# Altium PCB PCB.PcbDoc
Units mm, origin at the board's own origin, x right, y up, seen from the top; angles counter-clockwise.
Board outline 152.4 x 101.6 mm, 2 copper layers (Top Layer, Bottom Layer); 4 components, 40 nets, 73 pads, 0 vias.
Unrouted connection lines stored in the file: 24.
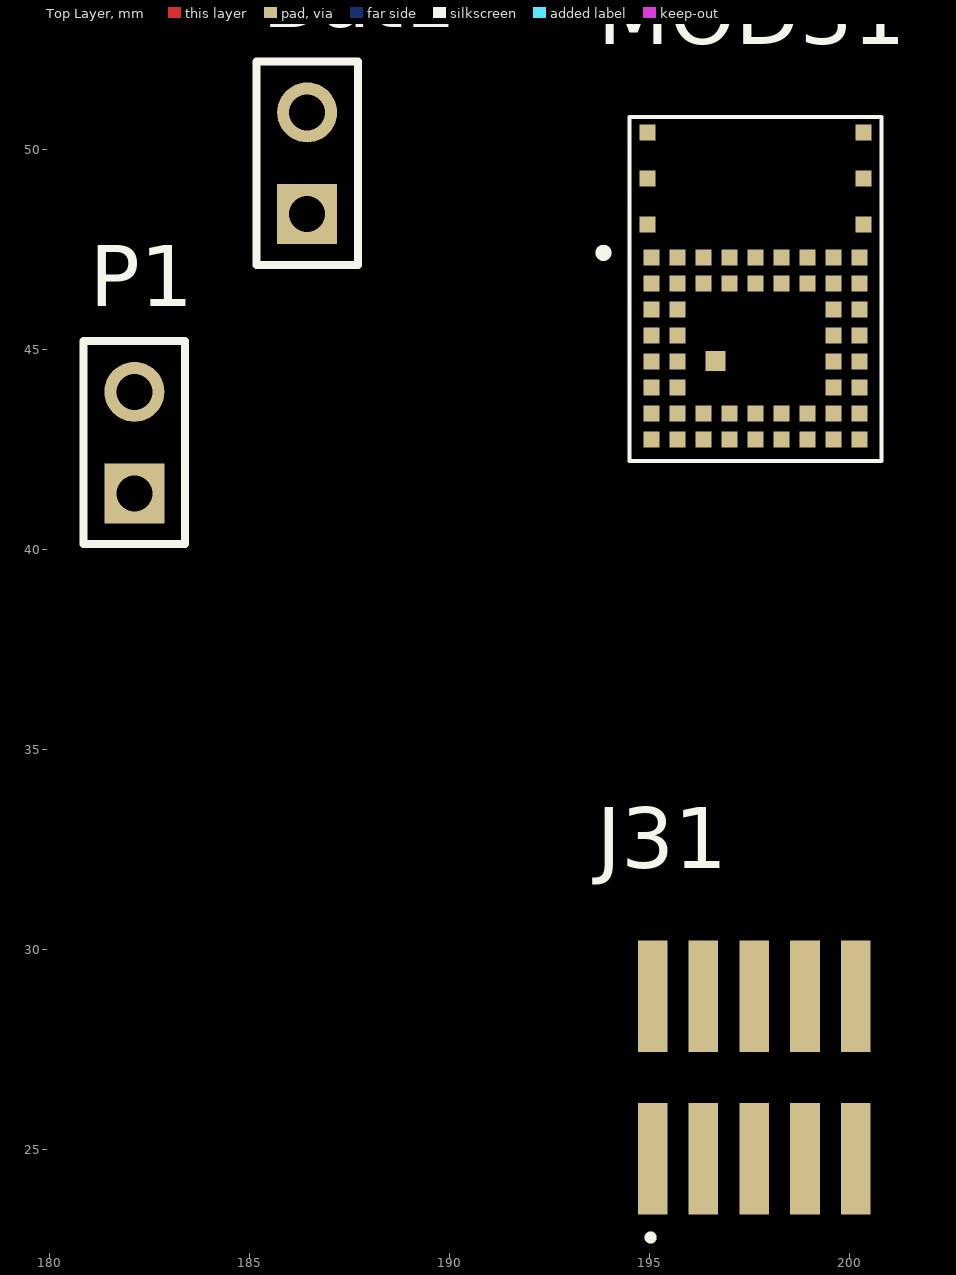
[diagram p0: Top Layer view]
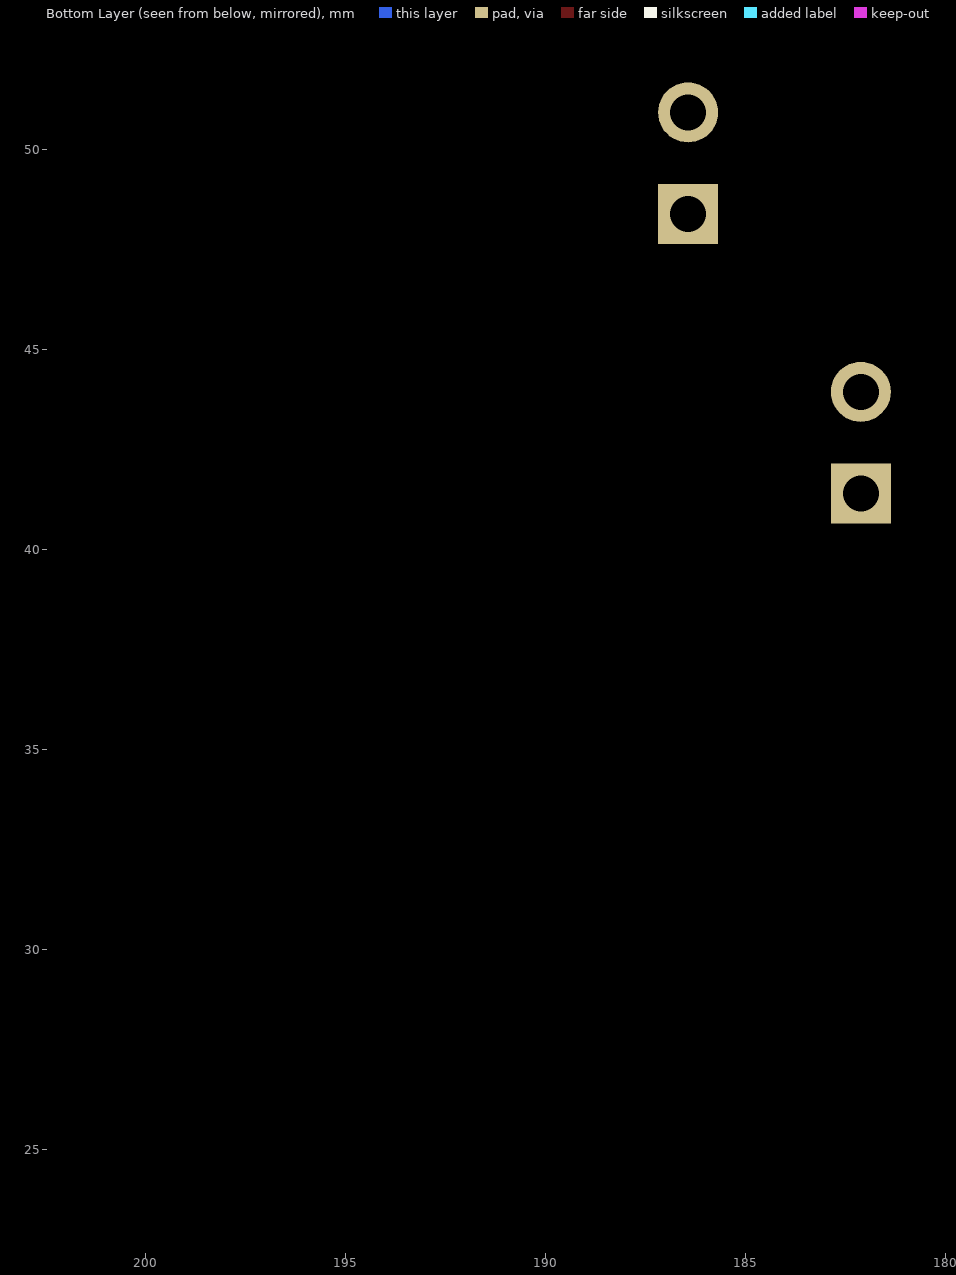
[diagram p1: Bottom Layer view, seen from below]

## Layer stack, top to bottom
Top Solder: solder mask 0.0102, Solder Resist, Dk 3.5
Top Layer: signal copper 0.0356
Dielectric 1: dielectric 0.32, FR-4, Dk 4.8
Bottom Layer: signal copper 0.0356
Bottom Solder: solder mask 0.0102, Solder Resist, Dk 3.5

## Board outline
25.4,25.4 177.8,25.4 177.8,127 25.4,127

## Design rules (kind name [scope] priority, off if disabled: settings)
Clearance [All] p1: gap=0.15 ignorepadtopadclearanceinfootprint=FALSE
DiffPairsRouting [All] p1: maxlimit=0.254 minlimit=0.15 mostfreqgap=0.254 toplayer_minwidth=0.1 toplayer_maxwidth=0.381 toplayer_prefwidth=0.381 bottomlayer_minwidth=0.1 bottomlayer_maxwidth=0.381 bottomlayer_prefwidth=0.381 maxuncoupledlength=12.7
HoleSize [All] p1: absolutevalues=TRUE maxlimit=2.54 minlimit=0.2 maxpercent=80.000 minpercent=20.000
PolygonConnect [All] p1: connectstyle=Relief reliefconductorwidth=0.254 reliefentries=4 polygonreliefangle="90 Angle" airgapwidth=0.254
RoutingVias [All] p1: holewidth=0.711 width=1.27 viastyle="Through Hole" minholewidth=0.1 minwidth=0.2 maxholewidth=0.711 maxwidth=1.27
SolderMaskExpansion [All] p1: expansion=0.102 istentingtop=FALSE
UnRoutedNet [All] p1: checkbadconnections=TRUE
Width [All] p1: maxlimit=2 minlimit=0.1 preferedwidth=0.254
27 further rules are at their usual default settings.

## Components (designator, comment, footprint, x,y, rotation, side; value= is the part's Value field where it differs from the comment)
Bat1 "Header 2" HDR1X2 186.436,48.387 r90 top
J31 "FTSH-105-01-L-DV-K-TR" FTSH10501LDVKTR 197.612,26.8 r0 top
MOD31 "Laird, BL653u" 45300059C 197.645,46.516 r0 top
P1 "Tensometr" HDR1X2 182.118,41.402 r90 top

## Footprints (in the part's own frame and the unit in brackets; to place one, negate y for a bottom-side part, rotate by r counter-clockwise, add the part's x,y. Pads: shape width x height; smd on the part's side, far side on the other; paste and mask are expansions set on the pad)
45300059C [mm]
  rect 0.4x0.4 smd: 1(-2.6,0.78) 2(-1.95,0.78) 3(-1.3,0.78) 4(-0.65,0.78) 5(0,0.78) 6(0.65,0.78) 7(1.3,0.78) 8(1.95,0.78) 9(2.6,0.78) 10(2.6,0.13) 11(2.6,-0.52) 12(2.6,-1.17) 13(2.6,-1.82) 14(2.6,-2.47) 15(2.6,-3.12) 16(2.6,-3.77) 17(1.95,-3.77) 18(1.3,-3.77) 19(0.65,-3.77) 20(0,-3.77) 21(-0.65,-3.77) 22(-1.3,-3.77) 23(-1.95,-3.77) 24(-2.6,-3.77) 25(-2.6,-3.12) 26(-2.6,-2.47) 27(-2.6,-1.82) 28(-2.6,-1.17) 29(-2.6,-0.52) 30(-2.6,0.13) 31(-1.95,0.13) 32(-1.3,0.13) 33(-0.65,0.13) 34(0,0.13) 35(0.65,0.13) 36(1.3,0.13) 37(1.95,0.13) 38(1.95,-0.52) 39(1.95,-1.17) 40(1.95,-1.82) 41(1.95,-2.47) 42(1.95,-3.12) 43(1.3,-3.12) 44(0.65,-3.12) 45(0,-3.12) 46(-0.65,-3.12) 47(-1.3,-3.12) 48(-1.95,-3.12) 49(-1.95,-2.47) 50(-1.95,-1.82) 51(-1.95,-1.17) 52(-1.95,-0.52) G2(2.7,3.91) G3(2.7,2.76) G4(2.7,1.61) G5(-2.7,1.61) G6(-2.7,2.76) G7(-2.7,3.91)
  rect 0.5x0.5 smd: G1(-1,-1.8)
  silkscreen extent -3.9,-4.3 3.15,4.3, body extent -3.15,-4.3 3.15,4.3, height 1.7
FTSH10501LDVKTR [mm]
  rect 0.74x2.79 smd: 1(-2.54,-2.035) 2(-2.54,2.035) 3(-1.27,-2.035) 4(-1.27,2.035) 5(0,-2.035) 6(0,2.035) 7(1.27,-2.035) 8(1.27,2.035) 9(2.54,-2.035) 10(2.54,2.035)
  silkscreen extent -2.64,-4.05 -2.54,-3.95, body extent -3.14,-3.36 3.14,3.36, height 6.15
HDR1X2 [mm] "Connector; Header; 2 Position"
  rect 1.5x1.5 hole 0.9: 1(0,0)
  round 1.5 hole 0.9: 2(2.54,0)
  silkscreen extent -1.27,-1.27 3.81,1.27

## Part data
Bat1: "Header, 2-Pin", LatestRevisionDate=17-Jul-2002, LatestRevisionNote="Re-released for DXP Platform.", Publisher="Altium Limited"
J31: "Conn Unshrouded Header HDR 10 POS 1.27mm Solder ST Top Entry SMD T/R", Manufacturer_Name=SAMTEC, Mouser Part Number=200-FTSH10501LDVKTR, Datasheet Link=https://componentsearchengine.com/Datasheets/2/FTSH-105-01-L-DV-K-TR.pdf, Geometry.Height=6.05mm, Manufacturer_Part_Number=FTSH-105-01-L-DV-K-TR, Mouser Price/Stock=https://www.mouser.co.uk/ProductDetail/Samtec/FTSH-105-01-L-DV-K-TR?qs=fnpEE5GccuNZAxvMlxrNVQ%3D%3D
MOD31: "BL653µ Integrated Antenna module, 453-00059", Manufacturer=Laird, Manufacturer Part Number=453-00059, Operating Temperature=-40C~85C, Datasheet Link=https://connectivity-staging.s3.us-east-2.amazonaws.com/s3fs-public/2018-12/BL654%20Datasheet%20v1_6.pdf, Mounting=SMT, Substitutes Allowed=NO
P1: library part "Header 2", "Header, 2-Pin", LatestRevisionDate=17-Jul-2002, LatestRevisionNote="Re-released for DXP Platform.", Publisher="Altium Limited"

## Nets (pads, with @x,y where several pads share a name; then routed paths per layer and width w, separated by ;. In a path a pad name is that pad's centre, name@x,y a point inside that pad or via, vN(x,y) a via of type N, cw(c..) or ccw(c..) an arc to the next point about the centre after c; other vN are vias at no path point)
AVCC: P1.1
GND: Bat1.1 J31.3 J31.5 J31.9 MOD31.1 MOD31.3 MOD31.5 MOD31.7 MOD31.9 MOD31.11 MOD31.16 MOD31.18 MOD31.20 MOD31.24 MOD31.48 MOD31.G1 MOD31.G2 MOD31.G3 MOD31.G4 MOD31.G5 MOD31.G6 MOD31.G7
NetBat1_2: Bat1.2
NetC010_1: 
NetC20_2: 
NetC23_1: 
NetIC11_4: 
NetIC12_1: P1.2
NetIC12_3: 
NetIC12_4: 
NetJ01_2: 
NetJ01_4: 
NetJ01_5: 
NetJ01_7: 
NetJ01_10: 
NetJ31_2: J31.2
NetJ31_4: J31.4
NetJ31_6: J31.6
NetJ31_10: J31.10
NetMCU1_8: 
NetMCU1_9: 
NetMCU1_14: 
NetMCU1_18: 
NetMCU1_19: MOD31.14
NetMCU1_20: MOD31.42
NetMCU1_21: MOD31.15
NetMCU1_22: MOD31.44
NetMCU1_27: MOD31.6
NetMCU1_28: MOD31.8
NetMOD31_31: MOD31.31
NetMOD31_34: MOD31.34
NetMOD31_51: MOD31.51
NetMOD31_52: MOD31.52
SPI1_MISO: 
SPI1_MOSI: 
SPI1_NSS_1: 
SPI1_NSS_2: 
SPI1_SCK: 
Vbat: 
Vcc: J31.1 MOD31.21 MOD31.22 MOD31.30
pads on no net: J31.7 J31.8 MOD31.2 MOD31.4 MOD31.10 MOD31.12 MOD31.13 MOD31.17 MOD31.19 MOD31.23 MOD31.25 MOD31.26 MOD31.27 MOD31.28 MOD31.29 MOD31.32 MOD31.33 MOD31.35 MOD31.36 MOD31.37 MOD31.38 MOD31.39 MOD31.40 MOD31.41 MOD31.43 MOD31.45 MOD31.46 MOD31.47 MOD31.49 MOD31.50